# EAGLE board radio (EAGLE 6.2)
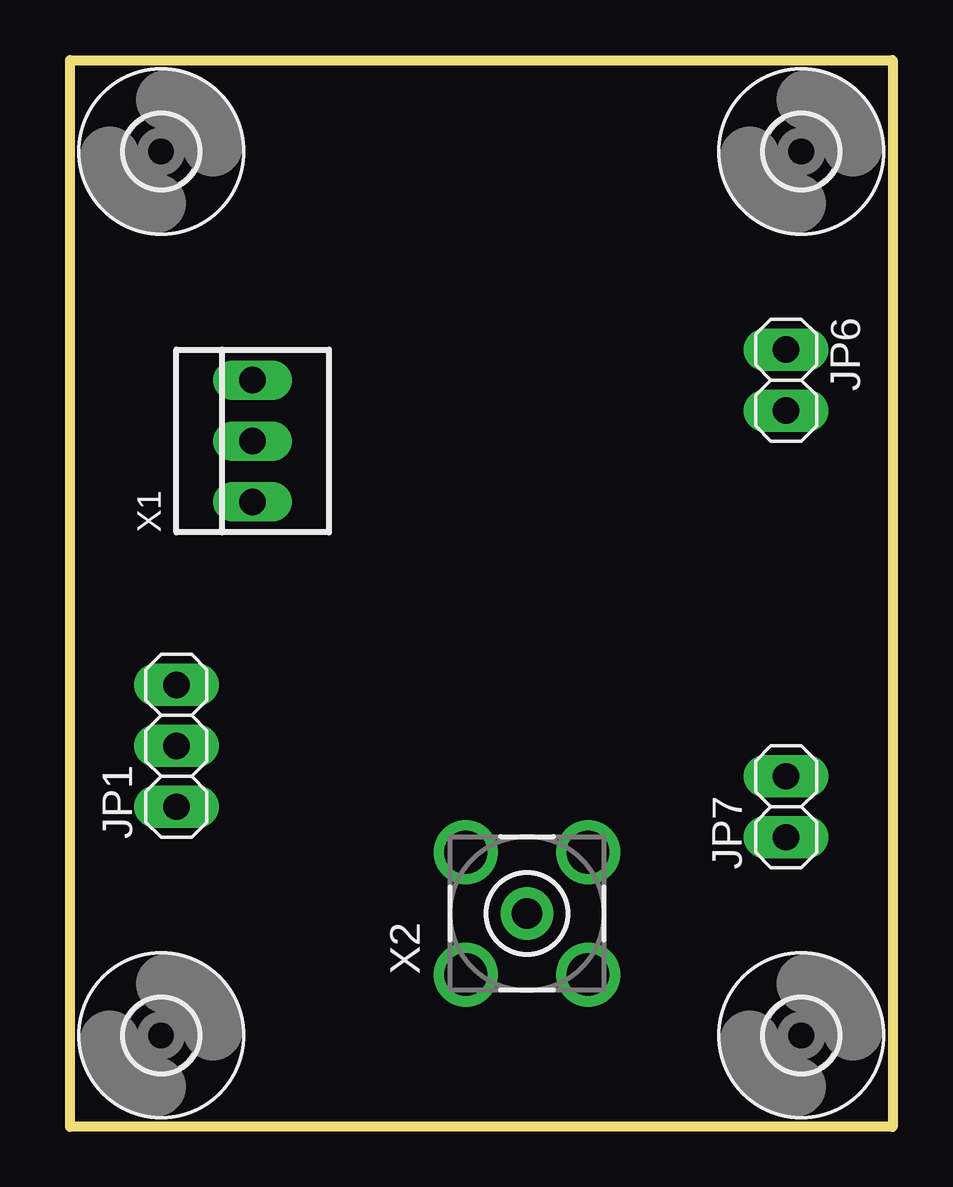
[diagram p0: board, top side]
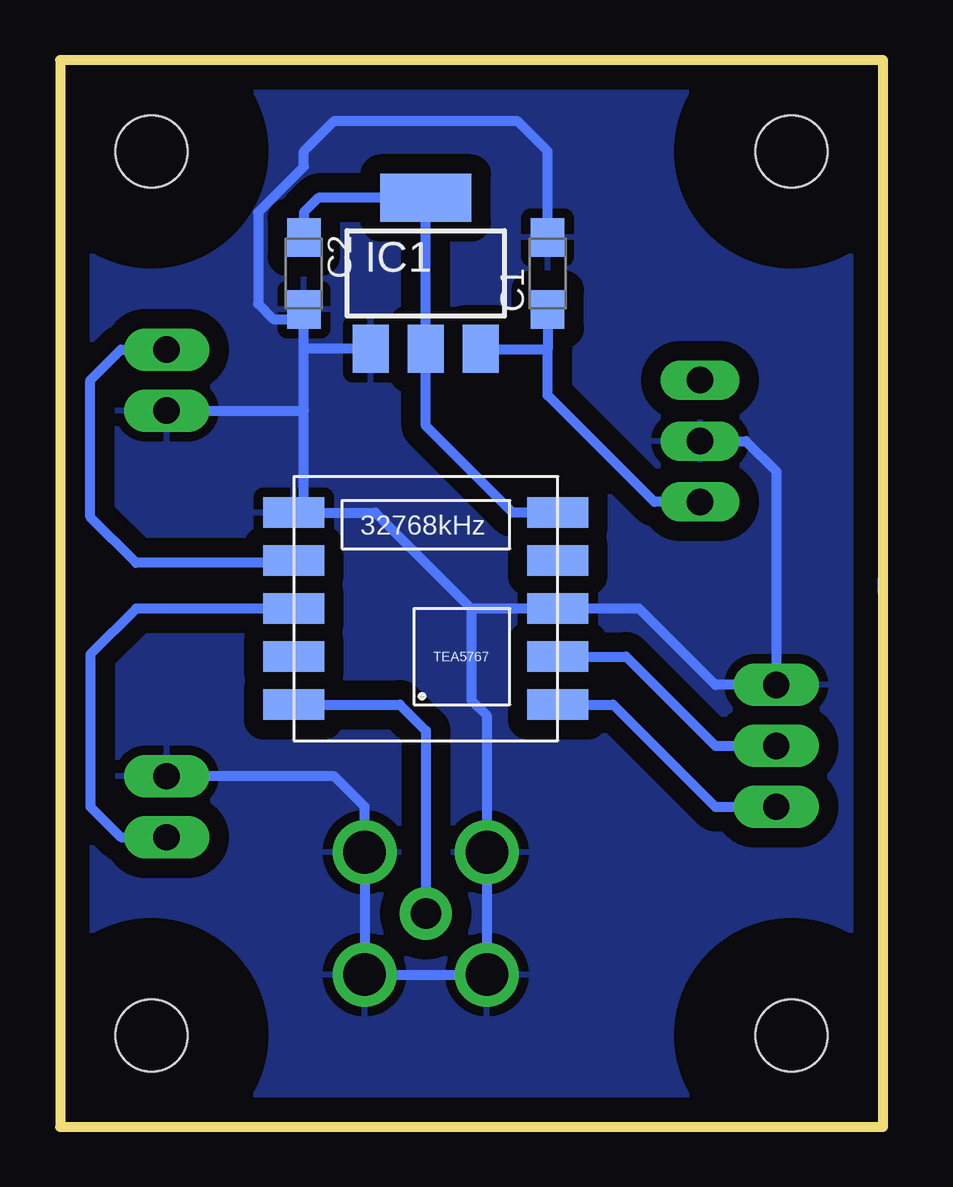
[diagram p1: board, bottom side, seen from below]

Size 34.29 x 44.45 mm. Coordinates in mm from the lower left corner, seen from the top.
Outline: 0.64,44.44 0,44.45
Outline: 0,44.45 0,0 34.29,0 34.29,44.45 0,44.45
Copper layers (1*16): Top 0.035mm / dielectric 1.5mm / Bottom 0.035mm
Design rules: minimum track width 10mil, minimum drill 24mil, track to track 8mil, track to pad 8mil, pad to pad 8mil, via to via 8mil, smd to smd 8mil, copper to edge 40mil, drill to drill 8mil, minimum pad ring 10mil, minimum via ring 8mil, stop-mask expansion 4mil, vias tented up to drill 0mil, thermal gap 16mil

## Footprints (pad centres in the part's own frame; a part is rotated, then mirrored left to right if it is on the bottom)
SMC_A = smd 1.6 x 1.4: + -1.5,0; - 1.5,0
SOT223 = smd 1.5 x 2: 1 -2.3,-3.15; 2 0,-3.15; 3 2.3,-3.15 | smd 3.8 x 2: 4 0,3.15
1X03 = drill 1.1 pad 1.778 long: 1 -2.54,0; 2 0,0; 3 2.54,0
1X02 = drill 1.1 pad 1.778 long: 1 -1.27,0; 2 1.27,0
TEA5767 = smd 2.54 x 1.27: 1 -5.5,4; 2 -5.5,2; 3 -5.5,0; 4 -5.5,-2; 5 -5.5,-4; 6 5.5,-4; 7 5.5,-2; 8 5.5,0; 9 5.5,2; 10 5.5,4
3,0 = hole 3: 0,0
22-23-2031 = drill 1.1 long: 1 -2.54,0; 2 0,0; 3 2.54,0
BU-SMA-V = drill 1.27 pad 2.184: 1 0,0 | drill 1.778: 2 -2.55,2.55; 3 2.55,2.55; 4 2.55,-2.55; 5 -2.55,-2.55

## Placement (x,y rotation side)
C1  [SMC_A]  13.97,35.56 90 bottom
C2  [SMC_A]  24.13,35.56 270 bottom
IC1  LM1117S  [SOT223]  19.05,35.56 0 bottom
JP1  [1X03]  4.45,15.88 90 top
JP6  [1X02]  29.84,31.11 270 top
JP7  [1X02]  29.84,13.34 90 top
U1  TEA5767  [TEA5767]  19.05,21.59 180 bottom
U$1  [3,0]  3.81,3.81 0 top
U$2  [3,0]  3.81,40.64 0 top
U$3  [3,0]  30.48,40.64 0 top
U$4  [3,0]  30.48,3.81 0 top
X1  [22-23-2031]  7.62,28.57 90 top
X2  [BU-SMA-V]  19.05,8.89 90 top

## Library data of the parts
C1 C2 IC1 JP1 JP6 JP7 U1 U$1-U$4 X1 = amp
X2 = amp; OC_FARNELL: unknown; OC_NEWARK: unknown

## Nets
+3V3: C2.+ IC1.2 IC1.4 U1.5
+12V: C1.+ IC1.3 X1.1
-12V: X1.3
GND: C1.- C2.- IC1.1 JP1.3 JP6.2 JP7.2 U1.3 U1.6 X1.2 X2.2 X2.3 X2.4 X2.5
N$1: U1.10 X2.1
OUT_L: JP6.1 U1.7
OUT_R: JP7.1 U1.8
SCL: JP1.2 U1.2
SDA: JP1.1 U1.1

## Tracks (layer width: path | path; a pad name or v marks a point on that pad's centre or on a via)
+3V3
  Bottom 0.406: C2.+ 24.13,38.1 23.52,38.71 IC1.4 IC1.2 19.05,29.21 15.43,25.59 U1.5
+12V
  Bottom 0.406: C1.+ 13.97,32.38 | 13.97,32.38 16.73,32.38 IC1.3 | X1.1 9.53,26.04 13.97,30.48 13.97,32.38
GND
  Bottom 0.406: 17.14,21.59 U1.3 10.16,21.59 6.99,18.41 JP1.3 4.45,27.3 5.71,28.57 X1.2 | 17.14,21.59 21.14,25.59 U1.6 24.55,25.61 24.13,26.04 24.13,29.84 | C1.- 13.97,40.64 15.24,41.91 22.86,41.91 24.13,40.64 24.13,40.01 26.04,38.1 26.04,34.29 25.4,33.66 24.54,33.66 C2.- 24.13,32.38 | 24.13,29.84 24.13,32.38 | IC1.1 24.11,32.41 24.13,32.38 | 17.14,21.59 17.14,17.78 16.51,17.14 X2.3 X2.2 X2.5 X2.4 21.6,13.35 22.86,14.61 JP7.2 | JP6.2 24.13,29.84
  pour Bottom (isolate 0.813): -1.27,45.72 -1.27,-1.27 35.56,-1.27 35.56,45.72
N$1
  Bottom 0.406: U1.10 20.13,17.59 19.05,16.51 X2.1
N$35
  Bottom 0.406: 0,22.23 0,22.86
OUT_L
  Bottom 0.254: 24.77,23.5 U1.7
  Bottom 0.406: 24.77,23.5 31.11,23.5 33.02,25.4 33.02,31.11 31.75,32.38 JP6.1
OUT_R
  Bottom 0.406: U1.8 31.11,21.59 33.02,19.68 33.02,13.34 31.75,12.06 JP7.1
SCL
  Bottom 0.406: U1.2 10.7,19.59 6.99,15.88 JP1.2
SDA
  Bottom 0.406: U1.1 11.24,17.59 6.99,13.34 JP1.1